# Altium PCB PCB1.PcbDoc
Units mm, origin at the board's own origin, x right, y up, seen from the top; angles counter-clockwise.
Board outline 87.76 x 101.98 mm, 2 copper layers (Top Layer, Bottom Layer); 49 components, 32 nets, 160 pads, 11 vias.
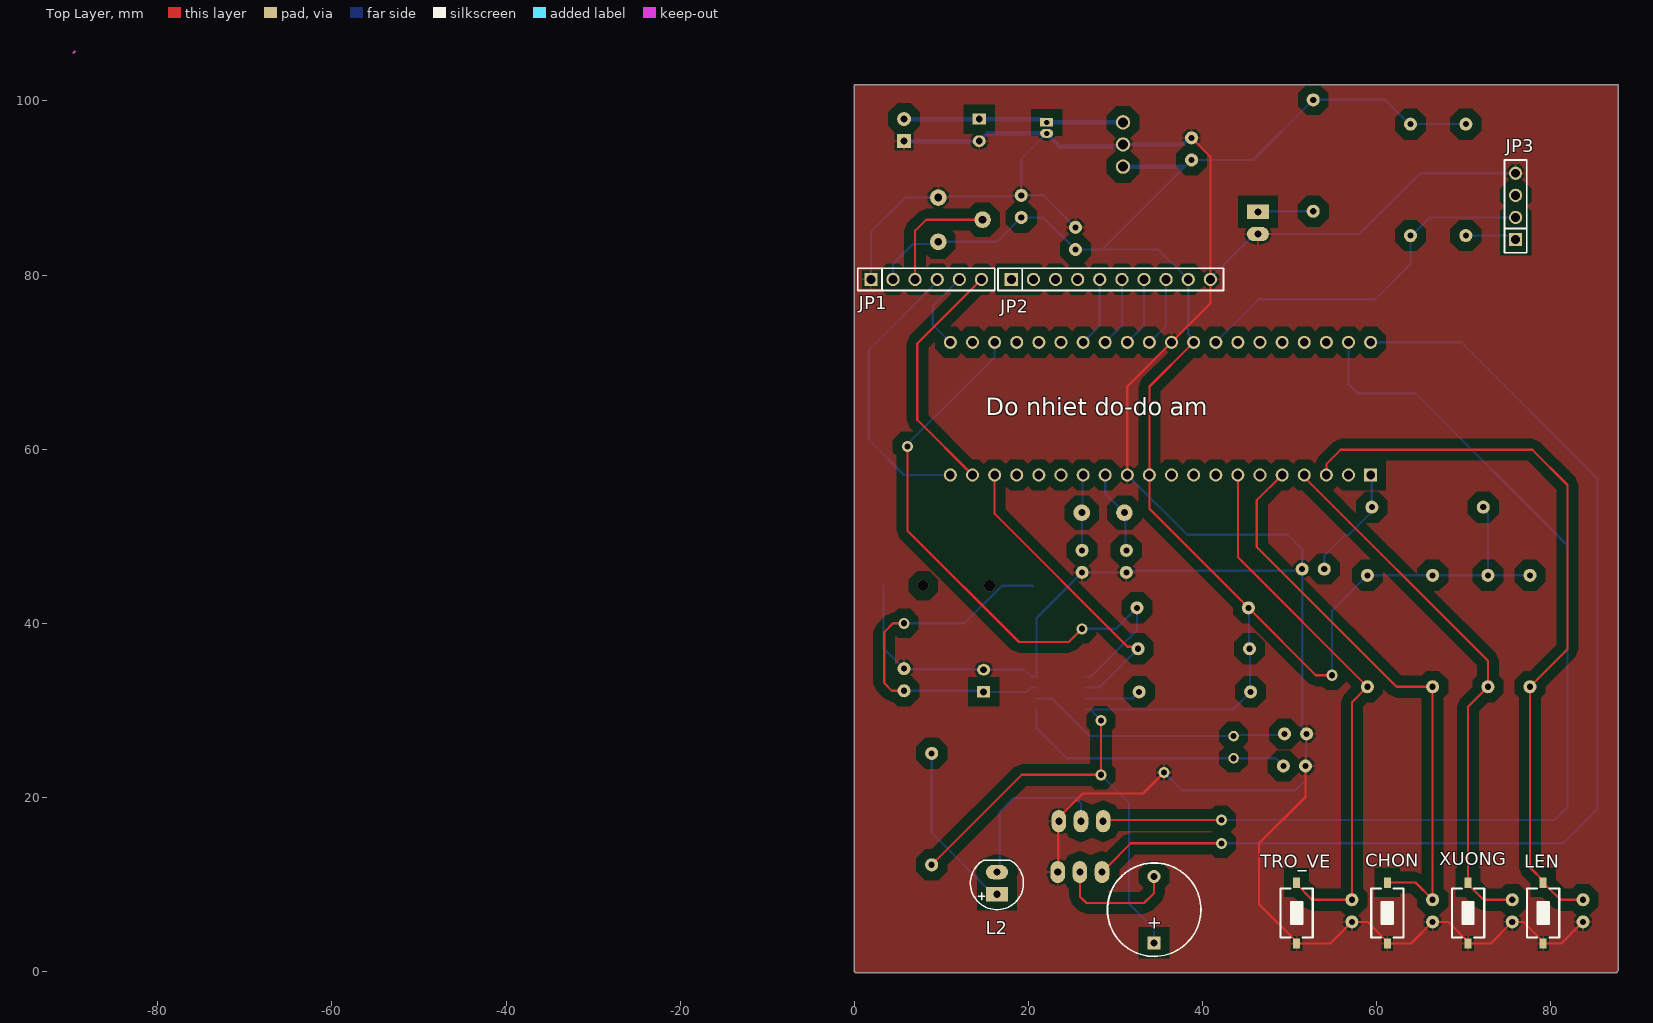
[diagram p0: Top Layer view]
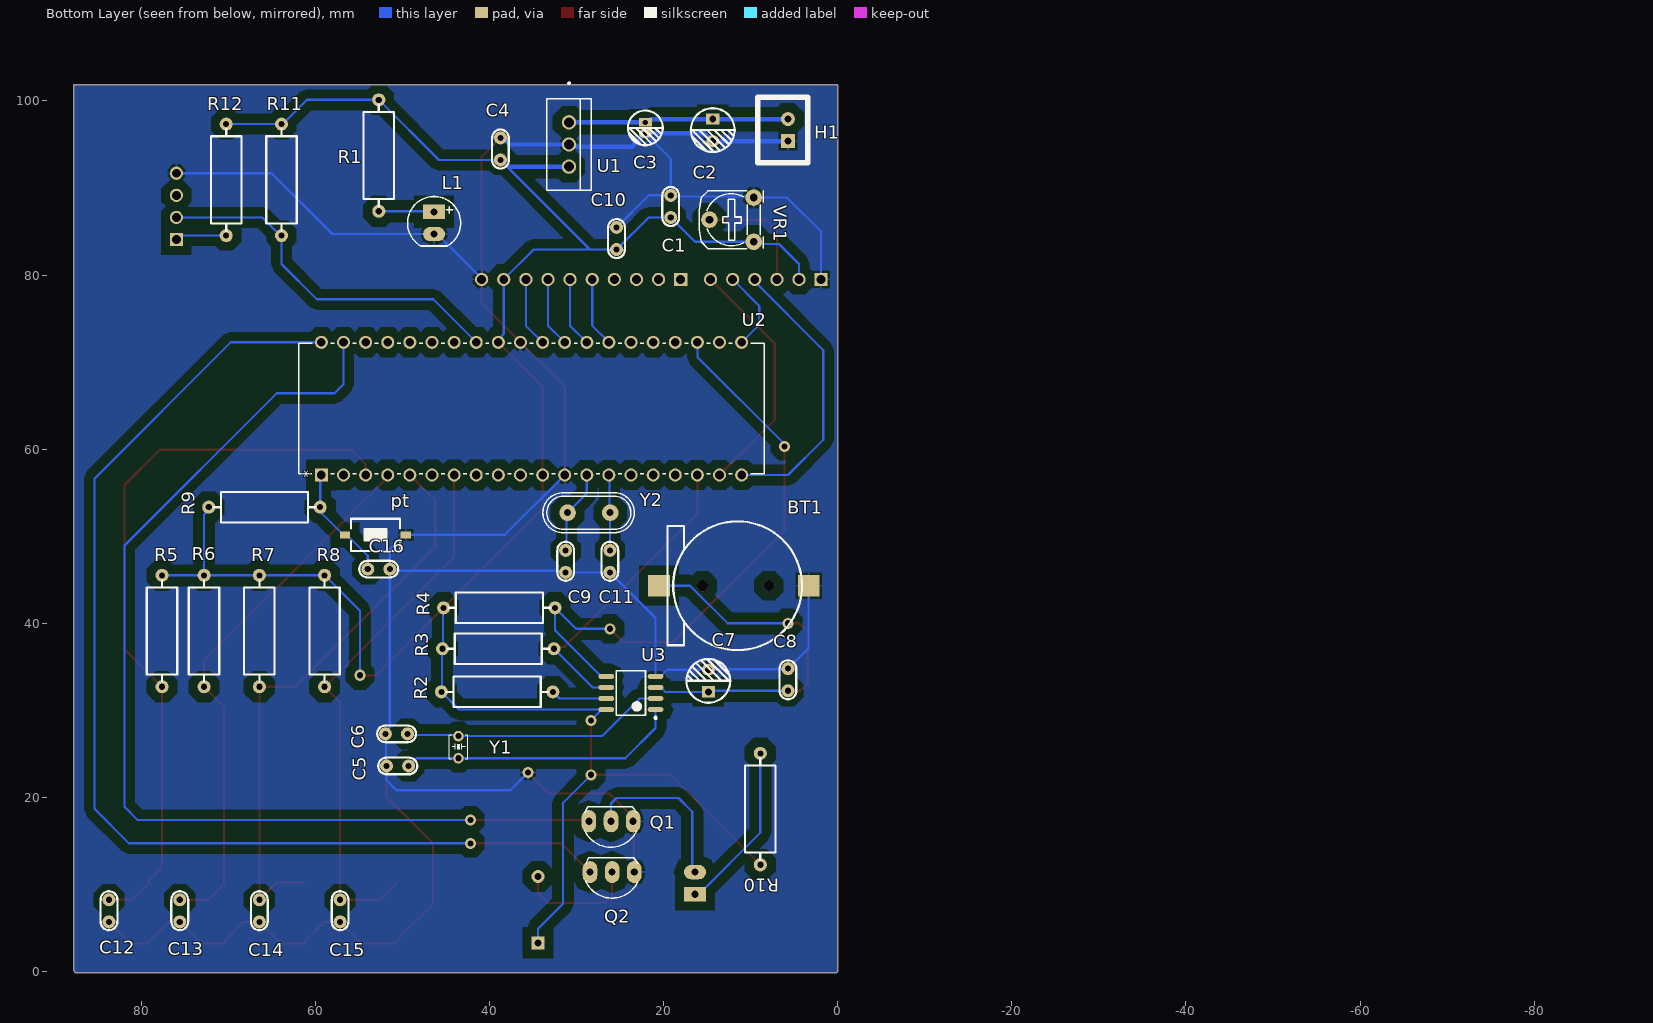
[diagram p1: Bottom Layer view, seen from below]
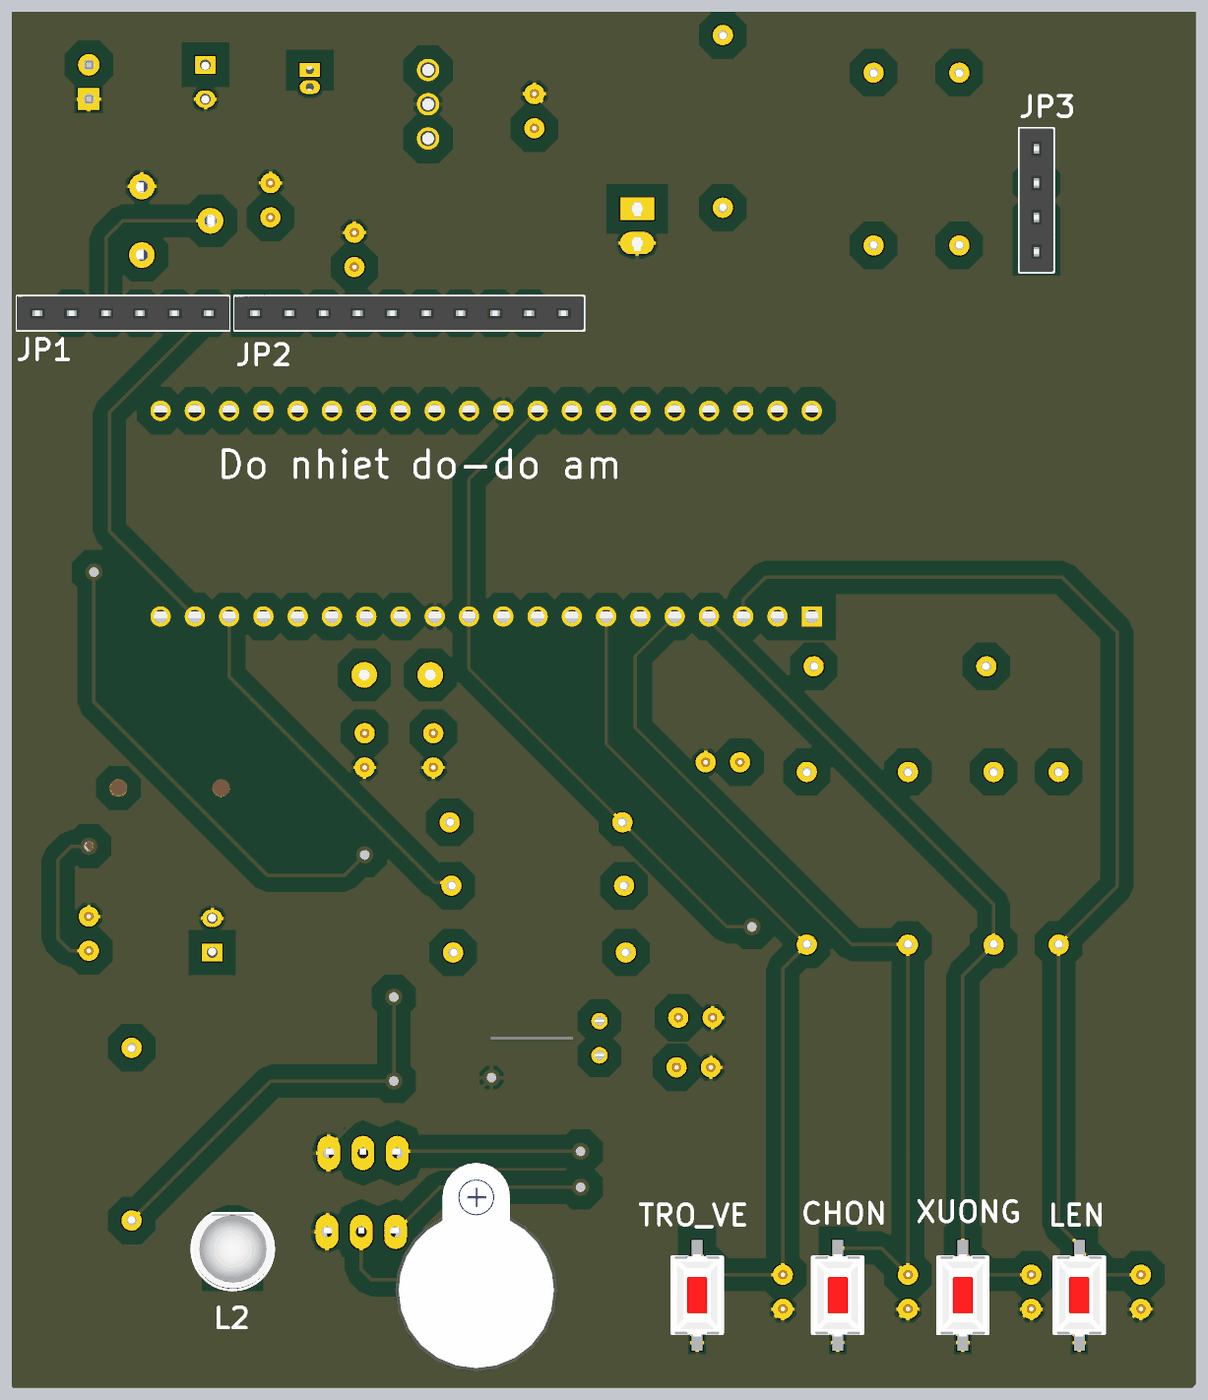
[diagram p2: 3D render of the assembled board from above, using the file's embedded part models]
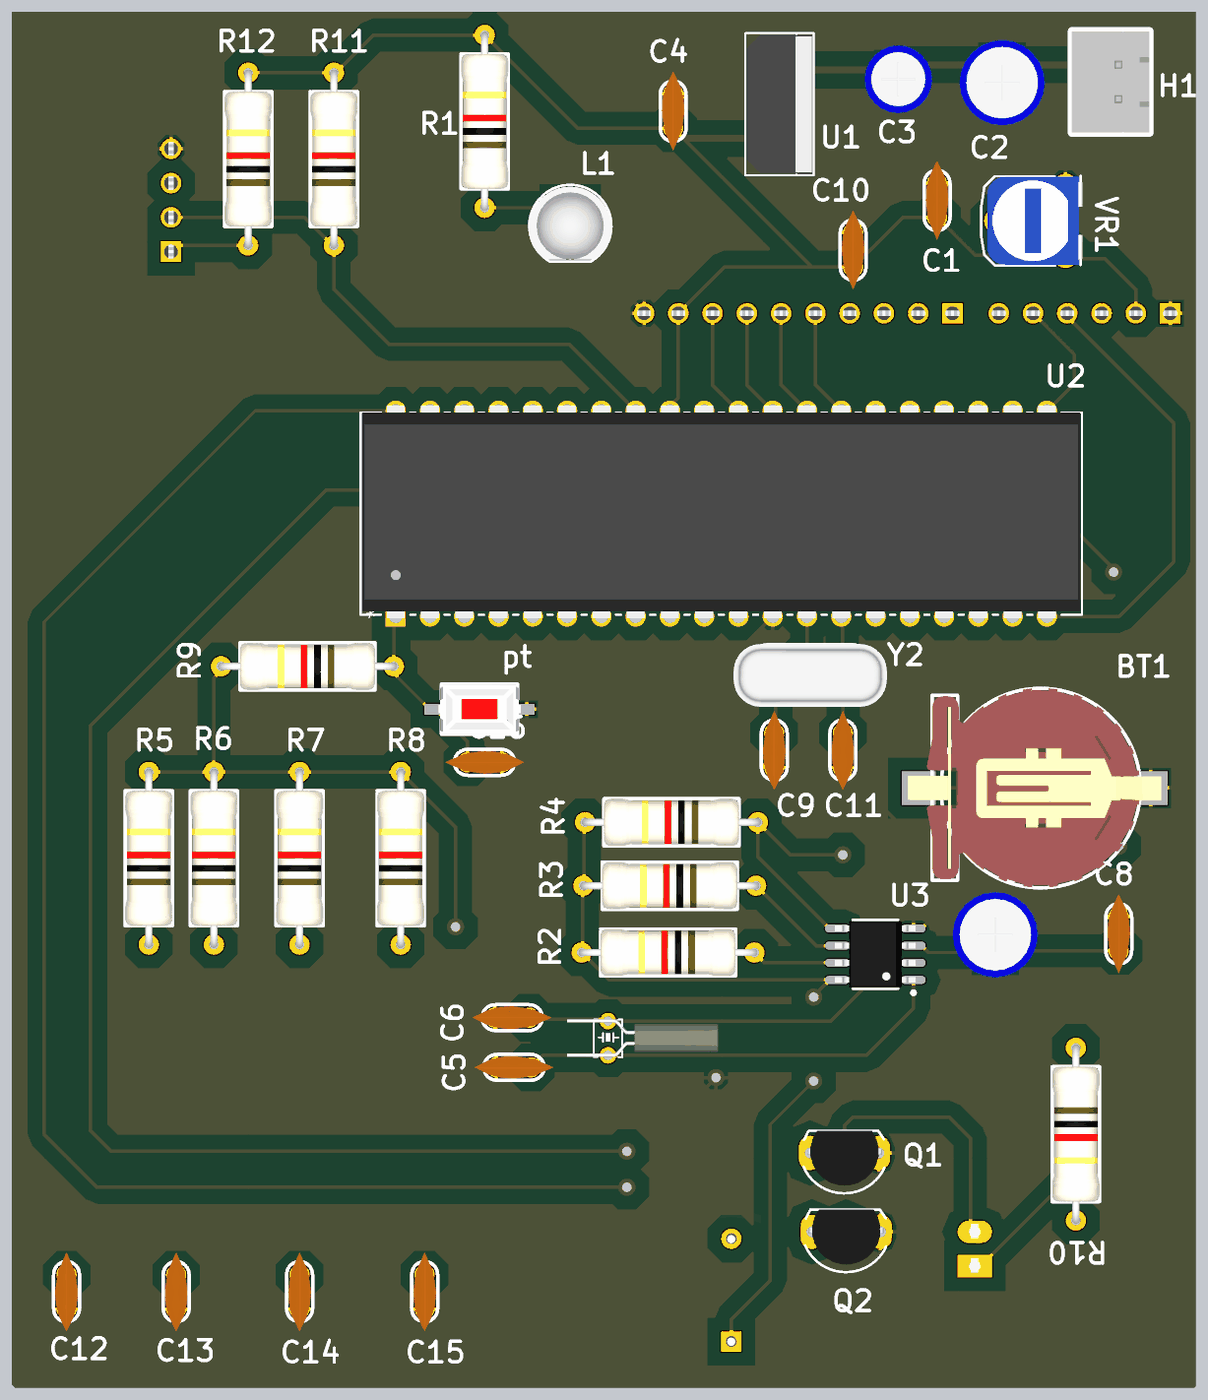
[diagram p3: 3D render of the assembled board from below, using the file's embedded part models]

## Layer stack, top to bottom
Top Solder: solder mask 0.0102, Solder Resist, Dk 3.5
Top Layer: signal copper 0.0356
Dielectric 1: dielectric 0.32, FR-4, Dk 4.8
Bottom Layer: signal copper 0.0356
Bottom Solder: solder mask 0.0102, Solder Resist, Dk 3.5

## Board outline
0,0 0.127,-0.127 87.503,-0.127 87.757,0.127 87.757,101.854 0,101.854

## Design rules (kind name [scope] priority, off if disabled: settings)
Clearance [All] p1: gap=1.016 ignorepadtopadclearanceinfootprint=FALSE
PolygonConnect [All] p1: connectstyle=Relief reliefconductorwidth=0.254 reliefentries=4 polygonreliefangle="90 Angle" airgapwidth=0.254
RoutingVias [All] p1: holewidth=0.508 width=0.889 viastyle="Through Hole" minholewidth=0.381 minwidth=0.635 maxholewidth=0.711 maxwidth=1.27
SolderMaskExpansion [All] p1: expansion=0.102 istentingtop=FALSE
Width [All] p1: maxlimit=1.27 minlimit=0.254 preferedwidth=0.508
30 further rules are at their usual default settings.

## Classes and differential pairs
component class Sheet1: BT1 C1 C2 C4 C5 C6 C7 C8 C9 C10 C11 C12 C13 C14 C15 C16 H1 JP1 JP2 JP3 L1 L2 LEN Q1 Q2 R1 R2 R3 R4 R5 R6 R7 R8 R9 R10 R11 TRO_VE U1 U3 XUONG Y1 Y2

## Components (designator, comment, footprint, x,y, rotation, side; value= is the part's Value field where it differs from the comment)
BT1 "CR1220 SMD" "DE PIN CR1220" 11.938,44.323 r270 bottom
C1 "104" "tu gom" 19.177,87.884 r90 bottom
C2 "47uF" "tu hoa 5mm" 14.351,96.647 r270 bottom
C3 "10uF" "tu hoa 4mm" 22.098,96.901 r270 bottom
C4 "104" "tu gom" 38.735,94.488 r90 bottom
C5 "22pF" "tu gom" 50.546,23.622 r0 bottom
C6 "22pF" "tu gom" 50.673,27.305 r0 bottom
C7 "220uF" "tu hoa 5mm" 14.859,33.401 r90 bottom
C8 "104" "tu gom" 5.715,33.528 r90 bottom
C9 "22pF" "tu gom" 31.242,47.117 r270 bottom
C10 "104" "tu gom" 25.4,84.201 r90 bottom
C11 "22pF" "tu gom" 26.162,47.117 r270 bottom
C12 "104" "tu gom" 83.693,6.985 r270 bottom
C13 "104" "tu gom" 75.565,6.985 r270 bottom
C14 "104" "tu gom" 66.421,6.985 r270 bottom
C15 "104" "tu gom" 57.15,6.985 r270 bottom
C16 "104" "tu gom" 52.705,46.228 r180 bottom
CHON "Nut Nhan 2 Chan SMD 3x6x2.5" "Nut Nhan 2 Chan SMD 3x6x2.5" 61.214,6.731 r270 top (schematic designator BT4)
H1 "Header 2P 2.54 Duc Thang" XH2.54M-2 5.715,95.377 r90 bottom
JP1 "JP 1x6 2.54" "JP 1x6 CT" 1.905,79.502 r0 top
JP2 "JP 1x10 2.54" "JP 1x10 CT" 18.034,79.502 r0 top
JP3 "DHT22" "JP 1x4 CT" 75.946,84.074 r90 top
L1 "LED 5mm" LED-5MM-RED 46.355,87.249 r270 bottom
L2 "LED 5mm" LED-5MM-RED 16.383,8.89 r90 top
LEN "Nut Nhan 2 Chan SMD 3x6x2.5" "Nut Nhan 2 Chan SMD 3x6x2.5" 79.121,6.731 r270 top (schematic designator BT2)
LS1 "Coi Chip Speaker" "Coi Chip Speacker" 34.43,3.302 r90 top
pt "Nut Nhan 2 Chan SMD 3x6x2.5" "Nut Nhan 2 Chan SMD 3x6x2.5" 53.086,50.165 r180 bottom (schematic designator BT6)
Q1 "C1815" TO92 26.035,17.272 r0 bottom value=C9014
Q2 "C1815" TO92 25.908,11.43 r0 bottom value=C9014
R1 "240R" "tro vach 1/2w" 52.705,93.726 r90 bottom
R2 "4.7k" "tro vach 1/2w" 39.116,32.131 r0 bottom
R3 "4.7k" "tro vach 1/2w" 38.989,37.084 r0 bottom
R4 "4.7k" "tro vach 1/2w" 38.862,41.783 r0 bottom
R5 "1k" "tro vach 1/2w" 77.597,39.116 r90 bottom
R6 "1k" "tro vach 1/2w" 72.771,39.116 r90 bottom
R7 "1k" "tro vach 1/2w" 66.421,39.116 r90 bottom
R8 "1k" "tro vach 1/2w" 58.928,39.116 r90 bottom
R9 "1k" "tro vach 1/2w" 65.836,53.34 r0 bottom
R10 "240R" "tro vach 1/2w" 8.89,18.669 r270 bottom
R11 "4.7k" "tro vach 1/2w" 63.881,90.932 r90 bottom
R12 "4.7k" "tro vach 1/2w" 70.231,90.932 r90 bottom
TRO_VE "Nut Nhan 2 Chan SMD 3x6x2.5" "Nut Nhan 2 Chan SMD 3x6x2.5" 50.8,6.731 r270 top (schematic designator BT5)
U1 "LM7805CT" TO220-3_ONS 30.861,97.536 r270 bottom
U2 "PIC16F877A-E/P" PDIP40_600MC_MCH 59.296,57.036 r90 bottom
U3 "DS1307" "SOP 8" 23.749,32.004 r0 bottom
VR1 "10K" "Bien Tro Tam Giac Dung" 9.652,83.82 r90 bottom
XUONG "Nut Nhan 2 Chan SMD 3x6x2.5" "Nut Nhan 2 Chan SMD 3x6x2.5" 70.485,6.731 r270 top (schematic designator BT3)
Y1 "32.768kHz" "Thach Anh 2 Chan 32,768 KHz" 43.561,27.051 r180 bottom value=4Mhz
Y2 "20MHz" "Thach Anh 2 chan cam" 28.575,52.705 r180 bottom value=4Mhz

## Footprints (in the part's own frame and the unit in brackets; to place one, negate y for a bottom-side part, rotate by r counter-clockwise, add the part's x,y. Pads: shape width x height; smd on the part's side, far side on the other; paste and mask are expansions set on the pad)
"Bien Tro Tam Giac Dung" [mil] "RM065"
  round 75 hole 35: 1(0,0) 2(100,200) 3(200,0)
  silkscreen extent -31,-44 231,246, body extent -28,-50 228,228, height 279
"Coi Chip Speacker" [mm]
  rect 1.5x1.5 hole 0.8: 1(0,0)
  round 1.5 hole 0.8: 2(7.62,0.013)
  silkscreen extent -1.55,-5.38 9.18,5.36, body extent -2.22,-6 13.24,6, height 4.5
"DE PIN CR1220" [mm]
  rect 2.5x2.5 smd: 1(0,-8.6) 2(0,8.6)
  silkscreen extent -7.39,-7.6 7.4,7.84, body extent -7.39,-9.42 7.36,9.38, height 4.27
"JP 1x4 CT" [mm]
  rect 1.52x1.52 hole 1.02: 1(0,0)
  round 1.52 hole 1.02: 2(2.54,0) 3(5.08,0) 4(7.62,0)
  silkscreen extent -1.52,-1.27 9.14,1.27, body extent -1.52,-1.25 9.14,1.25, height 8.51
"JP 1x6 CT" [mm] "6 row, straight, gold plating"
  rect 1.52x1.52 hole 1.02: 1(0,0)
  round 1.52 hole 1.02: 2(2.54,0) 3(5.08,0) 4(7.62,0) 5(10.16,0) 6(12.7,0)
  silkscreen extent -1.52,-1.27 14.22,1.27, body extent -1.52,-1.25 14.22,1.25, height 8.51
"JP 1x10 CT" [mm] "10 row, straight, gold plating"
  rect 1.52x1.52 hole 1.02: 1(0,0)
  round 1.52 hole 1.02: 2(2.54,0) 3(5.08,0) 4(7.62,0) 5(10.16,0) 6(12.7,0) 7(15.24,0) 8(17.78,0) 9(20.32,0) 10(22.86,0)
  silkscreen extent -1.52,-1.27 24.38,1.27, body extent -1.52,-1.25 24.38,1.25, height 8.51
LED-5MM-RED [mil] "LED 2 PIN, 5 ly , Only colour,pin to pin 100mil"
  rect 65x100 hole 32: 1(0,0)
  oval 65x100 hole 32: 2(100,0)
  silkscreen extent -70,-120 154,120, body extent -65,-119 149,118, height 339
"Nut Nhan 2 Chan SMD 3x6x2.5" [mm] "Switch SMD type"
  rect 1.2x0.8 smd: 1(-3.5,0) 2(3.5,0)
  silkscreen extent -2.82,-1.85 2.82,1.85, body extent -3.05,-1.85 3.05,1.85, height 2.5
PDIP40_600MC_MCH [mil]
  rect 59x59 / inner round 60 / far side rect 59x59 hole 39 paste-99999 mask+0: 1(0,0)
  round 59 / inner round 60 / far side round 59 hole 39 paste-99999 mask+0: 2(0,-100) 3(0,-200) 4(0,-300) 5(0,-400) 6(0,-500) 7(0,-600) 8(0,-700) 9(0,-800) 10(0,-900) 11(0,-1000) 12(0,-1100) 13(0,-1200) 14(0,-1300) 15(0,-1400) 16(0,-1500) 17(0,-1600) 18(0,-1700) 19(0,-1800) 20(0,-1900) 21(600,-1900) 22(600,-1800) 23(600,-1700) 24(600,-1600) 25(600,-1500) 26(600,-1400) 27(600,-1300) 28(600,-1200) 29(600,-1100) 30(600,-1000) 31(600,-900) 32(600,-800) 33(600,-700) 34(600,-600) 35(600,-500) 36(600,-400) 37(600,-300) 38(600,-200) 39(600,-100) 40(600,0)
  silkscreen extent 5,-2002 595,102, body extent -5,-1997 615,97, height 255
"SOP 8" [mm] "SOIC, 8-Leads, Body 4.9x3.9mm, Pitch 1.27mm, IPC High Density"
  oval 1.8x0.6 smd: 1(-2.825,1.905) 2(-2.825,0.635) 3(-2.825,-0.635) 4(-2.825,-1.905) 5(2.825,-1.905) 6(2.825,-0.635) 7(2.825,0.635) 8(2.825,1.905)
  silkscreen extent -2.95,-2.55 1.68,2.98, body extent -2.99,-2.45 3,2.45, height 1.6
"Thach Anh 2 Chan 32,768 KHz" [mil]
  round 48 hole 28: 1(0,0) 2(0,-100)
  silkscreen extent -42,-106 42,5, body extent -120,-105 321,6, height 66
"Thach Anh 2 chan cam" [mm]
  round 1.905 hole 0.8: 1(-2.45,0) 2(2.45,0)
  silkscreen extent -5.28,-2.29 5.21,2.29, body extent -5.68,-2.36 5.68,2.29, height 3.5
TO92 [mil] "TO-92"
  oval 66x100 hole 32: 1(-100,0) 2(0,0) 3(100,0)
  silkscreen extent -117,-65 120,118, body extent -109,-66 109,95, height 245
TO220-3_ONS [mil]
  round 65 / inner round 60 / far side round 65 hole 45 paste-99999 mask+0: 1(0,0) 2(100,0) 3(200,0)
  silkscreen extent -182,-100 308,100, body extent -103,-95 303,95, height 665
"tro vach 1/2w" [mm]
  round 1.5 hole 0.7: 1(-6.4,0) 2(6.4,0)
  silkscreen extent -5.84,-1.75 5.84,1.75, body extent -6.62,-1.75 6.62,1.75, height 3.5
"tu gom" [mm] "Tu gom mini"
  round 1.5 hole 0.7: 1(-1.27,0) 2(1.27,0)
  silkscreen extent -2.25,-0.97 2.22,0.97, body extent -2.92,-0.85 2.92,0.85, height 6.12
"tu hoa 4mm" [mm]
  rect 1x1.5 hole 0.6: 1(-0.635,0)
  oval 1x1.5 hole 0.6: 2(0.635,0)
  silkscreen extent -2,-2 2.01,2.01, body extent -2.47,-2.47 2.58,2.58, height 14.81
"tu hoa 5mm" [mm]
  rect 1.3x1.5 hole 0.8: 1(-1.27,0)
  oval 1.3x1.5 hole 0.8: 2(1.27,0)
  silkscreen extent -2.51,-2.51 2.51,2.51, body extent -3.12,-3.18 3.23,3.18, height 14.55
XH2.54M-2 [mm]
  rect 1.6x1.6 hole 0.8: 1(0,0)
  round 1.6 hole 0.8: 2(2.54,0)
  silkscreen extent -2.48,-2.26 5.02,3.46, body extent -2.48,-2.26 5.02,3.48, height 6.91

## Part data
BT1: library part "De pin CR1220 SMD", Ma_Hang=MH000833, Ten="Đế PIN CR1220 SMD"
C1 C4 C8 C10 C12 C13 C14 C15 C16: library part "Tu gom 104 50V", "Cắm", Chung_Loai=Cắm, Don_Vi=Con, Ma_Hang=MH004761, So_Chan=2, Ten_Linh_Kien="Tụ gốm 104 100nF 50V"
C2: library part "Tu Hoa 47uF 25V 5x8", "Cắm", Chung_Loai=Cắm, Don_Vi=Con, Ma_Hang=MH006860, So_Chan=2, Ten_Linh_Kien="Tụ Hóa 47uF 25V"
C3: library part "Tu Hoa 10uF 25V 4x7", "Cắm", Chung_Loai=Cắm, Don_Vi=Con, Ma_Hang=MH001349, So_Chan=2, Ten_Linh_Kien="Tụ Hóa 10uF 25V 4x7MM"
C5 C6 C9 C11: library part "Tu gom 22pF 50V", "Cắm", Chung_Loai=Cắm, Don_Vi=Con, Ma_Hang=MH004771, So_Chan=2, Ten_Linh_Kien="Tụ gốm 22P 50V"
C7: library part "Tu Hoa 220uF 10V 6x11", "Cắm", Chung_Loai=Cắm, Don_Vi=Con, Ma_Hang=MH004510, So_Chan=2, Ten_Linh_Kien="Tụ Hóa 220uF 10V 6x11MM"
H1: "Cắm", Chung_Loai=Cắm, Don_Vi=Con, Ma_Hang=MH001283, Ten_Linh_Kien="Header 2P XH2.54-2P Đực Thẳng"
JP1: library part "JP 1x6 2.54 Cai Thang", "Cắm", Chung_Loai=Cắm, Don_Vi=Con, Ma_Hang=MH004006, Ten_Linh_Kien="Jump Đơn Cái 2.54MM 1x20P Thẳng"
JP2: library part "JP 1x10 2.54 Cai Thang", "Cắm", Chung_Loai=Cắm, Don_Vi=Con, Ma_Hang=MH004006, Ten_Linh_Kien="Jump Đơn Cái 2.54MM 1x20P Thẳng"
JP3: library part "JP 1x4 2.54 Cai Thang", "Cắm", Chung_Loai=Cắm, Don_Vi=Con, Ma_Hang=MH004006, Ten_Linh_Kien="Jump Đơn Cái 2.54MM 1x20P Thẳng"
L1 L2: library part "LED 5mm Do", "Cắm", Chung_Loai=Cắm, Don_Vi=Con, Ma_Hang=MH008967, Ten_Linh_Kien="Led 5MM Phủ Đỏ (1000c)"
LS1: "Còi chip"
Q1 Q2: library part "Trans C1815 DIP", "NPN transistor"
R1 R5 R6 R7 R8 R9 R10: library part "Tro Vach 1/2W 5% 240R", "Cắm", Chung_Loai=Cắm, Don_Vi=Con, Ma_Hang=MH006191, So_Chan=2, Ten_Linh_Kien="Trở 5% 1/2w 240R"
R2 R3 R4 R11 R12: library part "Tro Vach 1/2W 5% 4.7k", "Cắm", Chung_Loai=Cắm, Don_Vi=Con, Ma_Hang=MH006198, So_Chan=2, Ten_Linh_Kien="Trở 5% 1/2w 4.7k"
U1: "No Description Available", Mfr_Name=onsemi, Copyright="Copyright (C) 2023 Ultra Librarian. All rights reserved.", Manufacturer_Part_Number=LM7805CT, RefDes=RefDes, Type=DEV
U2: library part PIC16F877A-EP, "No Description Available", Mfr_Name=Microchip, Copyright="Copyright (C) 2023 Ultra Librarian. All rights reserved.", Manufacturer_Part_Number=PIC16F877A-E/P, RefDes=RefDes, Type=DEV
U3: "C5145427"
VR1: library part "Bien tro tam giac 10K Dung", "Cắm", Chung_Loai=Cắm, Don_Vi=Con, Ma_Hang=MH000919, Ten_Linh_Kien="Biến Trở Tam Giác 103-10K RM065 (Chân Đứng)"
Y1: library part "Thach Anh 2 chan 32,768 Khz", "Crystal For all Crystal 2pin."
Y2: library part "Thach Anh 2 chan Cam", "Crystal For all Crystal 2pin."
CHON LEN pt TRO_VE XUONG: Ma_Hang=MH001036, Ten="Nút Nhấn 2 Chân 3x6x2.5MM SMD"

## Via types
v1: diameter 1.27, hole 0.711, Top Layer to Bottom Layer, tented both sides, 9 vias
v2: diameter 1.27, hole 1.27, Top Layer to Bottom Layer, tented both sides, 2 vias

## Nets (pads, with @x,y where several pads share a name; then routed paths per layer and width w, separated by ;. In a path a pad name is that pad's centre, name@x,y a point inside that pad or via, vN(x,y) a via of type N, cw(c..) or ccw(c..) an arc to the next point about the centre after c; other vN are vias at no path point)
5V: C1.1 C4.1 C10.1 JP1.2 JP2.9 LS1.1 R1.2 R2.2 R3.2 R4.2 R5.2 R6.2 R7.2 R8.2 R9.2 R10.2 R11.2 R12.2 U1.3 U2.11 U2.32 U3.8 VR1.1 | length 278.3
  Top Layer w0.254: R10.2 19.227,22.606 v1(28.321,22.606) v1(28.321,28.829) ; U2.32 33.896,67.196 U2.11 33.896,53.149 R4.2 53.009,34.036 v1(54.864,34.036)
  Bottom Layer w0.254: JP1.2 4.445,81.28 6.731,83.566 9.398,83.566 VR1.1 16.383,83.82 C1.1 21.717,86.614 C10.1 28.448,82.931 ; U3.8 U3.8@27.112,30.099 ; v1(28.321,22.606) 31.536,19.391 31.536,7.834 34.43,4.94 LS1.1 ; v1(28.321,28.829) 28.321,28.89 U3.8@27.112,30.099 ; U2.32@39.052,72.276 U2.32 38.976,72.612 38.354,73.235 JP2.9 34.925,82.931 28.448,82.931 ; R4.2 45.325,41.719 45.325,37.148 R3.2 45.452,37.02 45.452,32.194 R2.2 43.484,30.099 U3.8@27.112,30.099 ; v1(54.864,34.036) 54.864,41.452 R8.2 R7.2 R6.2 ; R11.2@63.817,97.268 60.96,100.126 R1.2 45.797,93.218 C4.1 28.448,82.931 ; R11.2 R12.2 ; R9.2 72.236,53.003 72.771,52.468 R6.2 ; R5.2 R6.2
  Bottom Layer w0.508: U1.3 37.705,92.456
BUZZER: Q2.3 U2.40 | length 130.3
  Top Layer w0.254: Q2.3 28.448,11.477 29.105,12.134 29.152,12.134 31.75,14.732 v1@42.037,14.732
  Bottom Layer w0.254: v1(42.164,14.732) 81.407,14.732 85.344,18.669 85.344,56.642 69.71,72.276 U2.40
CHON: C14.1 CHON.1 R7.1 U2.5 | length 66.8
  Top Layer w0.254: U2.5 46.228,54.127 46.228,48.768 62.28,32.716 R7.1 C14.1 64.445,10.231 CHON.1
D4: JP2.5 U2.27 | length 8
  Bottom Layer w0.254: U2.27 28.194,74.193 JP2.5
D5: JP2.6 U2.28 | length 8
  Bottom Layer w0.254: U2.28 30.734,74.193 JP2.6
D6: JP2.7 U2.29 | length 8
  Bottom Layer w0.254: U2.29 33.274,74.193 JP2.7
D7: JP2.8 U2.30 | length 8.2
  Top Layer w0.254: U2.30 U2.30@34.01,72.389
  Bottom Layer w0.254: U2.30 35.814,74.193 JP2.8
DHT22: JP3.2 R11.1 U2.33 | length 42.3
  Bottom Layer w0.254: U2.33 46.457,77.216 59.817,77.216 63.881,81.28 R11.1 64.008,84.532 66.09,86.614 JP3.2
EN: JP1.6 U2.19 | length 28.1
  Top Layer w0.254: U2.19 7.239,63.373 7.239,72.136 JP1.6
GND: BT1.2 C1.2 C2.2 C3.2 C4.2 C5.2 C6.2 C7.2 C8.2 C9.2 C10.2 C11.2 C12.2 C13.2 C14.2 C15.2 C16.2 CHON.2 H1.1 JP1.1 JP2.10 JP3.4 L1.2 LEN.2 pt.2 Q1.1 Q2.1 TRO_VE.2 U1.2 U2.12 U2.31 U3.4 VR1.3 XUONG.2 | length 377.7
  Top Layer w0.254: Q2.1 23.431,11.493 23.431,17.209 Q1.1 23.495,17.704 26.238,20.447 33.147,20.447 v1(35.56,22.86) ; U2.12 31.356,67.196 U2.31 40.894,76.733 JP2.10 40.894,93.599 C4.2 ; C5.2 51.816,20.066 46.482,14.732 46.482,7.749 50.8,3.431 TRO_VE.2 54.666,3.231 C15.2 58.93,5.715 61.214,3.431 CHON.2 63.937,3.231 C14.2 68.201,5.715 70.485,3.431 XUONG.2 73.081,3.231 C13.2 76.837,5.715 79.121,3.431 LEN.2 81.209,3.231 C12.2
  Bottom Layer w0.254: JP1.1 1.905,84.963 5.842,88.9 VR1.3 9.779,89.027 19.05,89.027 C1.2 ; BT1.2 3.338,37.175 C8.2 5.779,34.734 14.795,34.734 C7.2 19.562,34.671 20.324,33.909 U3.4 20.924,40.609 C11.2 C9.2 31.432,46.038 51.244,46.038 C16.2 ; C3.2 22.05,96.266 21.705,95.921 21.705,95.873 19.177,93.345 C1.2 ; C10.2 21.717,89.154 C1.2 ; U2.12 38.227,50.165 pt.2 49.786,50.165 51.435,48.516 C16.2 ; v1(35.56,22.86) 37.592,20.828 50.673,20.828 51.816,21.971 C5.2 ; JP2.10 40.894,79.597 46.006,84.709 L1.2 58.032,84.709 65.017,91.694 JP3.4 ; C5.2@51.88,23.685 51.88,27.241 C6.2 51.943,27.569 51.435,28.077 C16.2
  Bottom Layer w0.508: H1.1 C2.2 15.24,96.266 C3.2@22.05,96.266 ; C3.2 23.622,94.742 29.992,94.742 30.027,94.777 30.642,94.777 U1.2 37.705,94.996 38.467,95.758 C4.2 C4.2@38.672,95.822
LED: Q1.3 U2.39 | length 121.7
  Top Layer w0.254: Q1.3 28.702,17.399 v1(42.164,17.399)
  Bottom Layer w0.254: v1(42.164,17.399) 80.391,17.399 81.915,18.923 81.915,48.939 64.433,66.421 57.785,66.421 56.756,67.45 U2.39
LEN: C12.1 LEN.1 R5.1 U2.3 | length 84.9
  Top Layer w0.254: U2.3 54.216,58.28 55.88,59.944 77.851,59.944 81.915,55.88 81.915,37.034 R5.1 77.597,11.955 79.121,10.431 LEN.1 79.121,10.031 79.394,9.758 79.594,9.758 81.097,8.255 C12.1
NetBT1_1: BT1.1 C7.1 C8.1 U3.3 | length 43.3
  Top Layer w0.254: C8.1 4.318,32.258 3.429,33.147 3.429,38.989 4.445,40.005 v1(5.715,40.005)
  Bottom Layer w0.254: C8.1 14.732,32.258 C7.1 19.816,32.131 20.324,32.639 U3.3 ; v1(5.715,40.005) 12.641,40.005 16.959,44.323 BT1.1
NetC2_1: C2.1 C3.1 H1.2 U1.1 | length 25.3
  Bottom Layer w0.508: H1.2 C2.1 21.467,97.917 21.848,97.536 C3.1 U1.1
NetC5_1: C5.1 U3.1 Y1.2 | length 32.3
  Bottom Layer w0.254: U3.1 20.924,27.971 24.384,24.511 Y1.2 48.387,24.511 C5.1
NetC6_1: C6.1 U3.2 Y1.1 | length 30.4
  Bottom Layer w0.254: U3.2 22.733,31.369 27.051,27.051 Y1.1 43.688,27.178 49.276,27.178 C6.1
NetJP3_1: JP3.1 R12.1 | length 5.9
  Bottom Layer w0.254: R12.1 75.488,84.532 JP3.1
NetL1_1: L1.1 R1.1 | length 6.4
  Bottom Layer w0.254: L1.1 46.432,87.326 R1.1
NetL2_1: L2.1 R10.1 | length 19.5
  Bottom Layer w0.254: R10.1 8.89,15.938 15.938,8.89 L2.1
NetL2_2: L2.2 Q1.2 | length 19.3
  Bottom Layer w0.254: L2.2 16.703,11.75 16.703,18.354 18.288,19.939 25.4,19.939 26.035,19.304 Q1.2
NetLS1_2: LS1.2 Q2.2 | length 14
  Top Layer w0.254: Q2.2 25.908,8.636 26.67,7.874 33.274,7.874 34.417,9.017 LS1.2
NetR2_1: R2.1 U3.7 | length 6.5
  Bottom Layer w0.254: U3.7 31.954,31.369 R2.1
OSCIN: C9.1 U2.13 Y2.1 | length 9.7
  Bottom Layer w0.254: U2.13 28.816,54.914 Y2.1 31.133,52.596 31.133,48.496 C9.1
OSCO: C11.1 U2.14 Y2.2 | length 8.7
  Bottom Layer w0.254: C11.1 26.144,48.405 26.144,52.687 Y2.2 26.201,52.781 26.201,56.96 U2.14
RESET: C16.1 pt.1 R9.1 U2.1 | length 13.4
  Bottom Layer w0.254: C16.1 53.975,47.754 56.386,50.165 pt.1 56.786,50.165 59.198,52.577 59.198,53.102 R9.1 59.436,56.896 U2.1
RS: JP1.4 U2.20 | length 32.7
  Bottom Layer w0.254: JP1.4 9.525,79.248 1.651,71.374 1.651,61.087 5.702,57.036 U2.20
RW: JP1.5 U2.21 | length 9.3
  Bottom Layer w0.254: U2.21 9.017,74.295 9.017,76.454 JP1.5
SCL: R3.1 U2.18 U3.6 | length 35.2
  Top Layer w0.254: U2.18 16.116,52.591 31.385,37.322 32.351,37.322 R3.1
  Bottom Layer w0.254: U3.6 28.144,32.639 R3.1
SDA: R4.1 U2.23 U3.5 | length 69.7
  Top Layer w0.254: v1(6.096,60.325) 6.096,50.673 18.923,37.846 24.638,37.846 v1(26.162,39.37)
  Bottom Layer w0.254: v1(6.096,60.325) 6.096,60.579 16.116,70.599 U2.23 ; v1(26.162,39.37) 30.049,39.37 R4.1 32.462,39.197 27.174,33.909 U3.5
TRO_VE: C15.1 R8.1 TRO_VE.1 U2.7 | length 63
  Top Layer w0.254: U2.7 44.056,47.588 R8.1 57.15,30.938 C15.1 52.576,8.255 50.8,10.031 TRO_VE.1
VSS: JP1.3 VR1.2 | length 13.9
  Top Layer w0.254: JP1.3 6.985,85.09 8.255,86.36 VR1.2
XUONG: C13.1 R6.1 U2.4 XUONG.1 | length 62.5
  Top Layer w0.254: U2.4 51.676,56.782 72.771,35.687 R6.1 70.485,30.43 XUONG.1 70.485,10.031 72.261,8.255 C13.1
pads on no net: JP2.1 JP2.2 JP2.3 JP2.4 JP3.3 U2.2 U2.6 U2.8 U2.9 U2.10 U2.15 U2.16 U2.17 U2.22 U2.24 U2.25 U2.26 U2.34 U2.35 U2.36 U2.37 U2.38
copper on no net:
  other v2: 7.912,44.323 15.517,44.318

## Polygon pours and split planes (outlines as drawn)
GND on Bottom Layer "GND_L02_P001" (solid, remove dead copper, pour order 1): 0,101.854 87.757,101.854 87.757,0.127 87.503,-0.127 0.127,-0.127 0,0
GND on Top Layer "GND_L01_P004" (solid, remove dead copper, pour order 4): 0,101.854 87.757,101.854 87.757,0.127 87.503,-0.127 0.127,-0.127 0,0

## Keep-outs
Top Layer:
  lines w0.254: -89.662,105.537 -89.535,105.664

## Silkscreen, mask and mechanical layers (free items; w line width, h text height)
Top Overlay:
  text "Do nhiet do-do am" at 15.113,63.881 h2

## Text inside footprints (layer, text, board x,y; h text height)
LS1: Top Overlay "+" at 35.141,4.712 h1.52 r90
U1: Mechanical 13 "TAB" at 29.4,95.472 h0.64 r90
U2: Mechanical 13 "*" at 58.661,57.226 h1.27 r270; Bottom Overlay "*" at 60.173,56.718 h1.27 r270